# Altium PCB LoRaMicroClimate.PcbDoc
Units mil, origin at the board's own origin, x right, y up, seen from the top; angles counter-clockwise.
Board outline 3300 x 2600 mil, 4 copper layers (Top Layer, VBAT_POS, 3.3V_PER, Bottom Layer), stack 23.756 mil thick; 44 components, 29 nets, 146 pads, 30 vias.
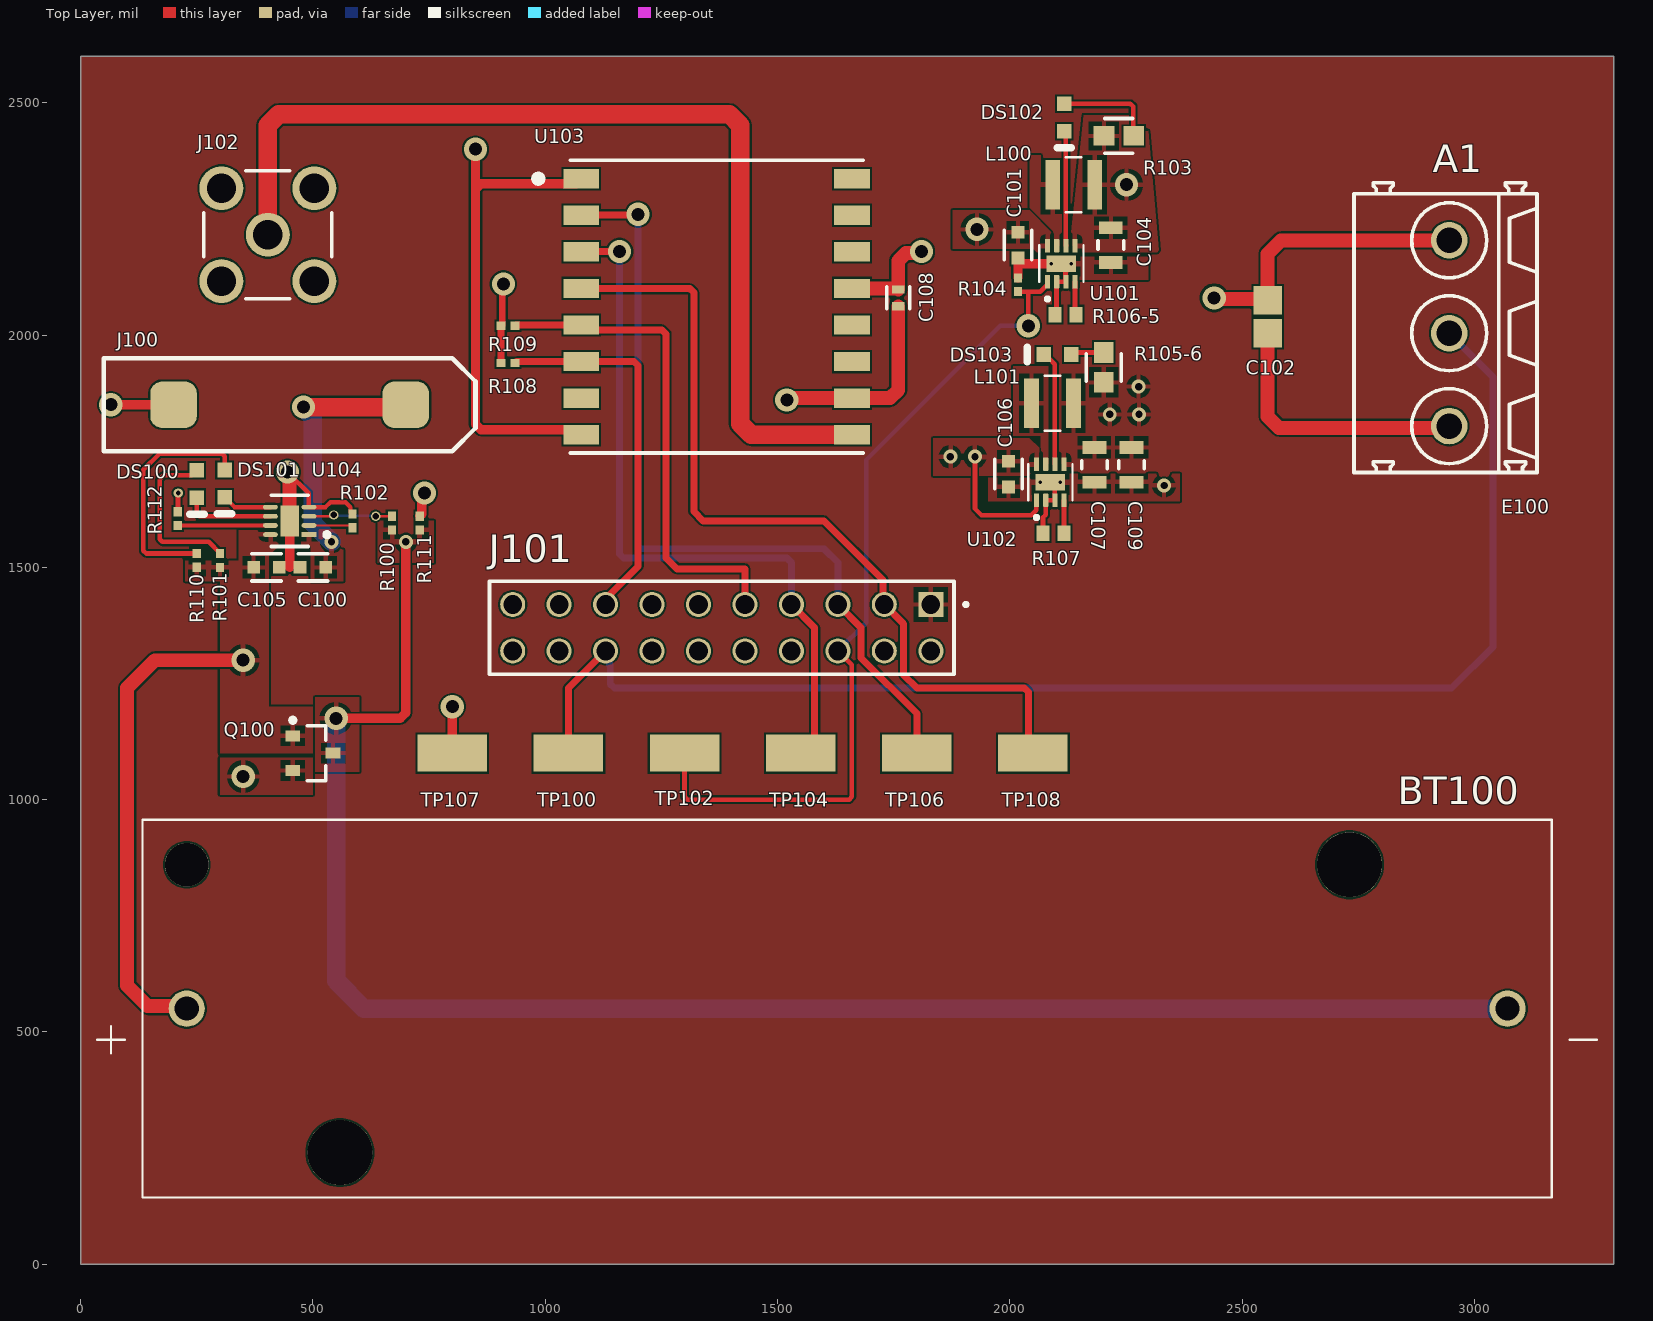
[diagram p0: Top Layer view]
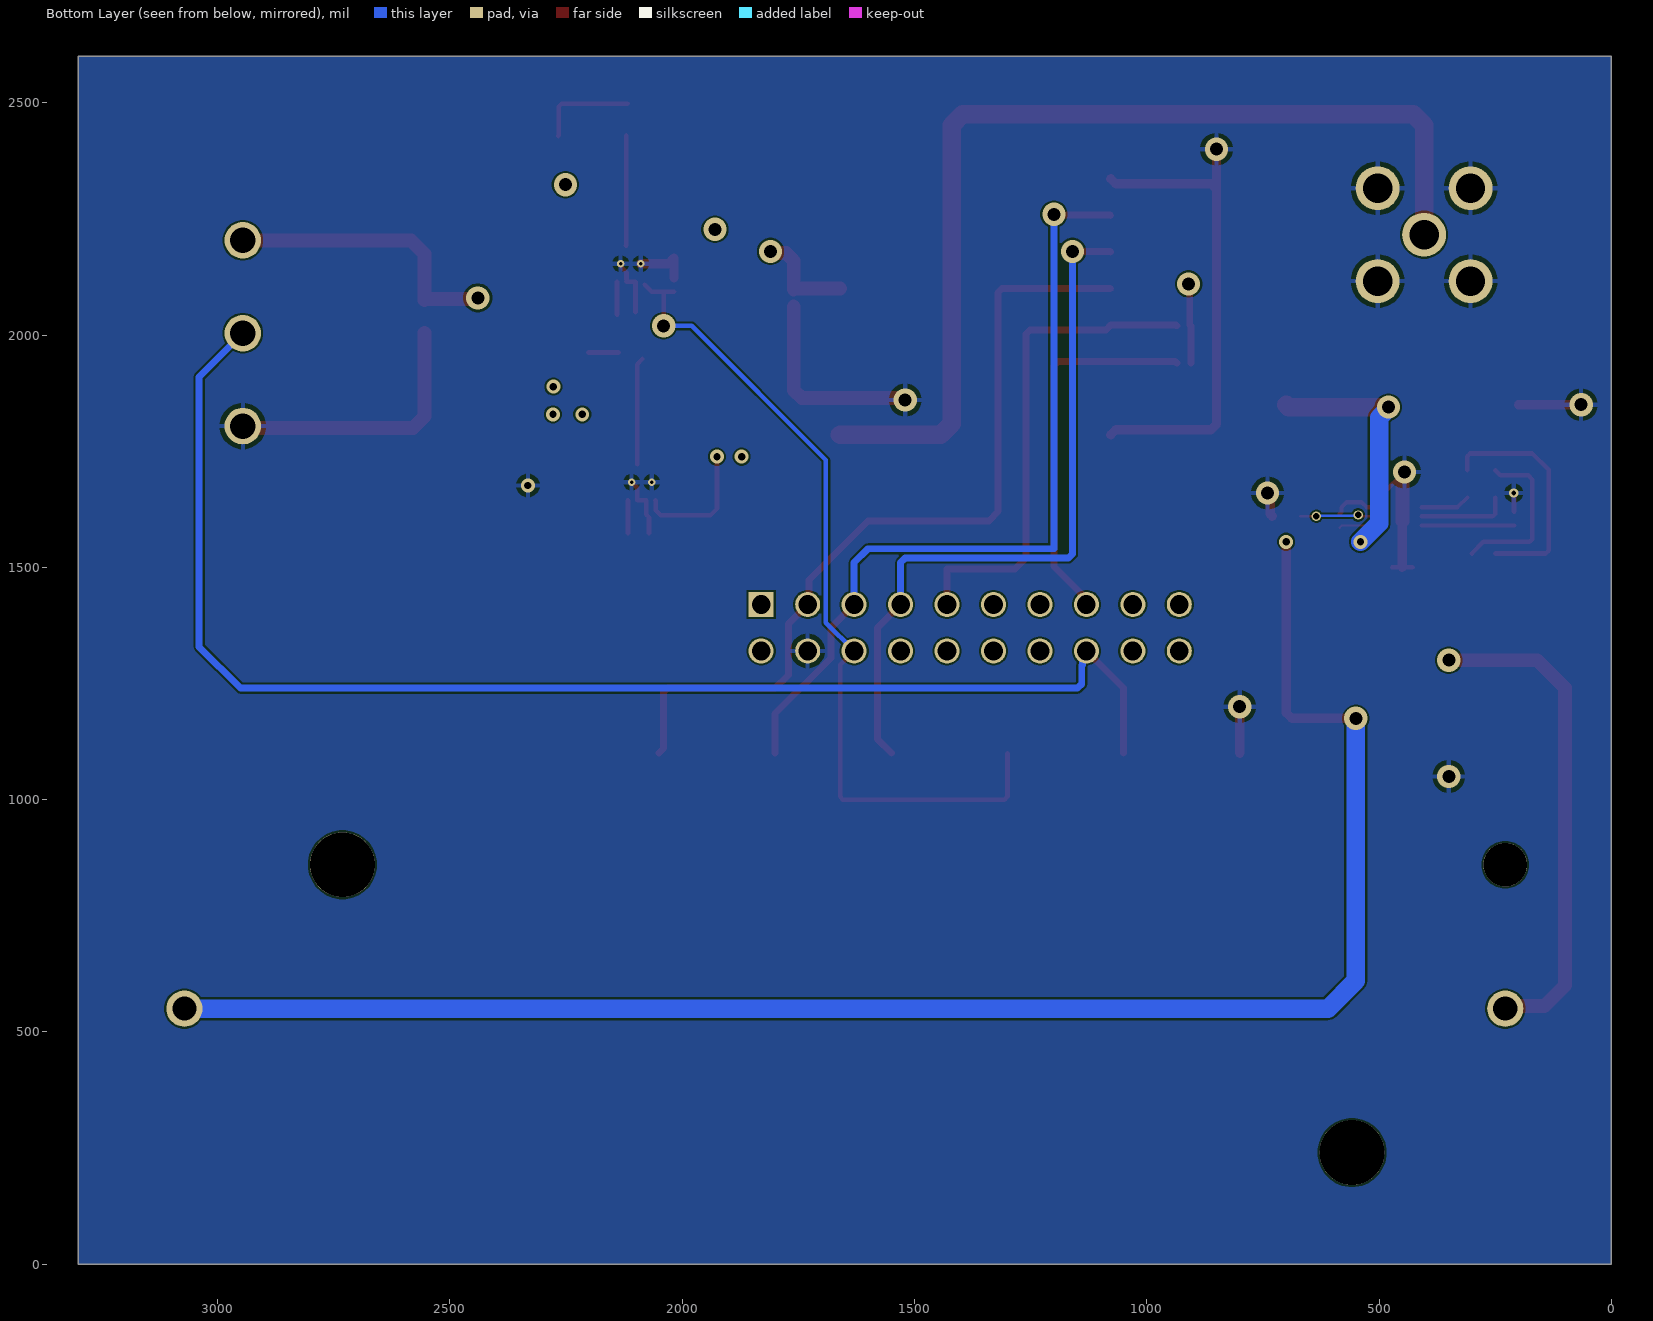
[diagram p1: Bottom Layer view, seen from below]
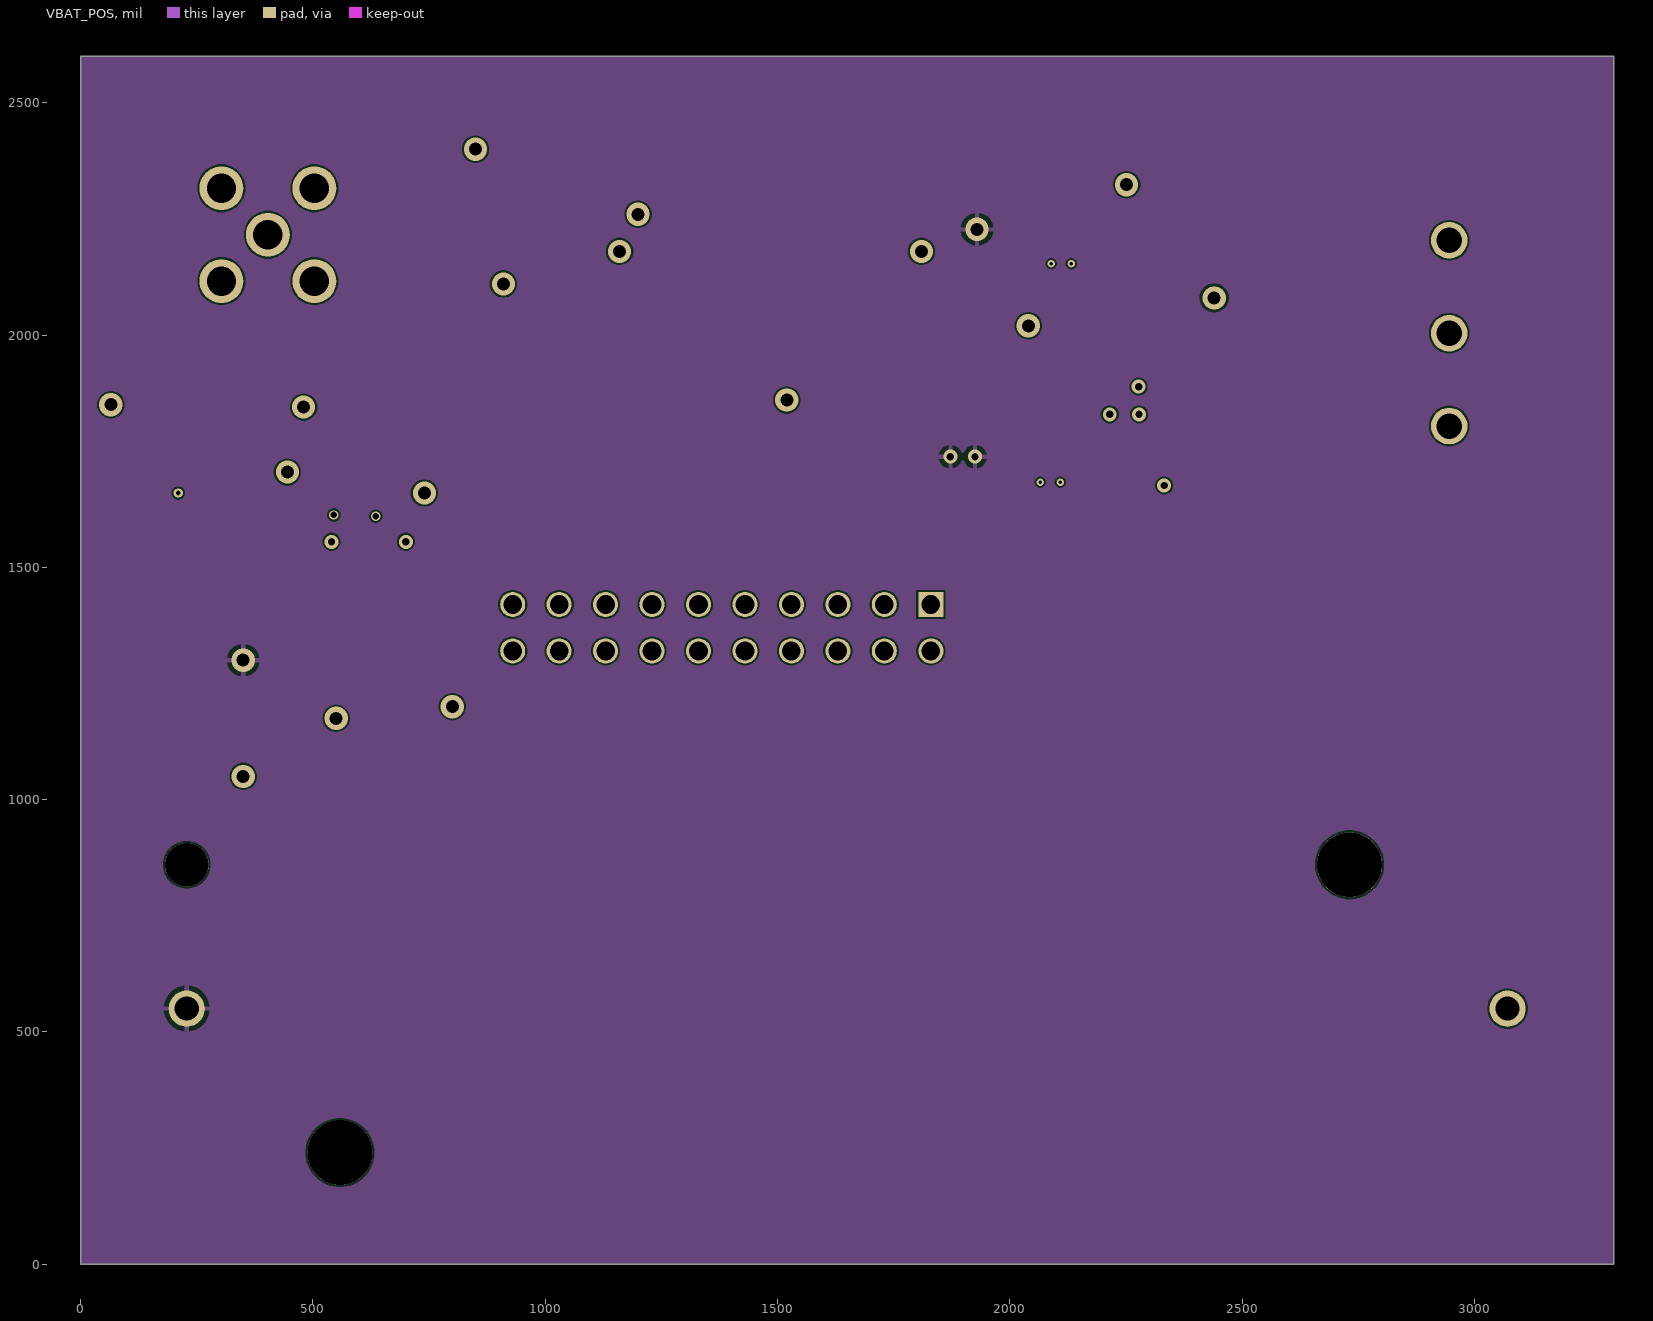
[diagram p2: VBAT_POS]
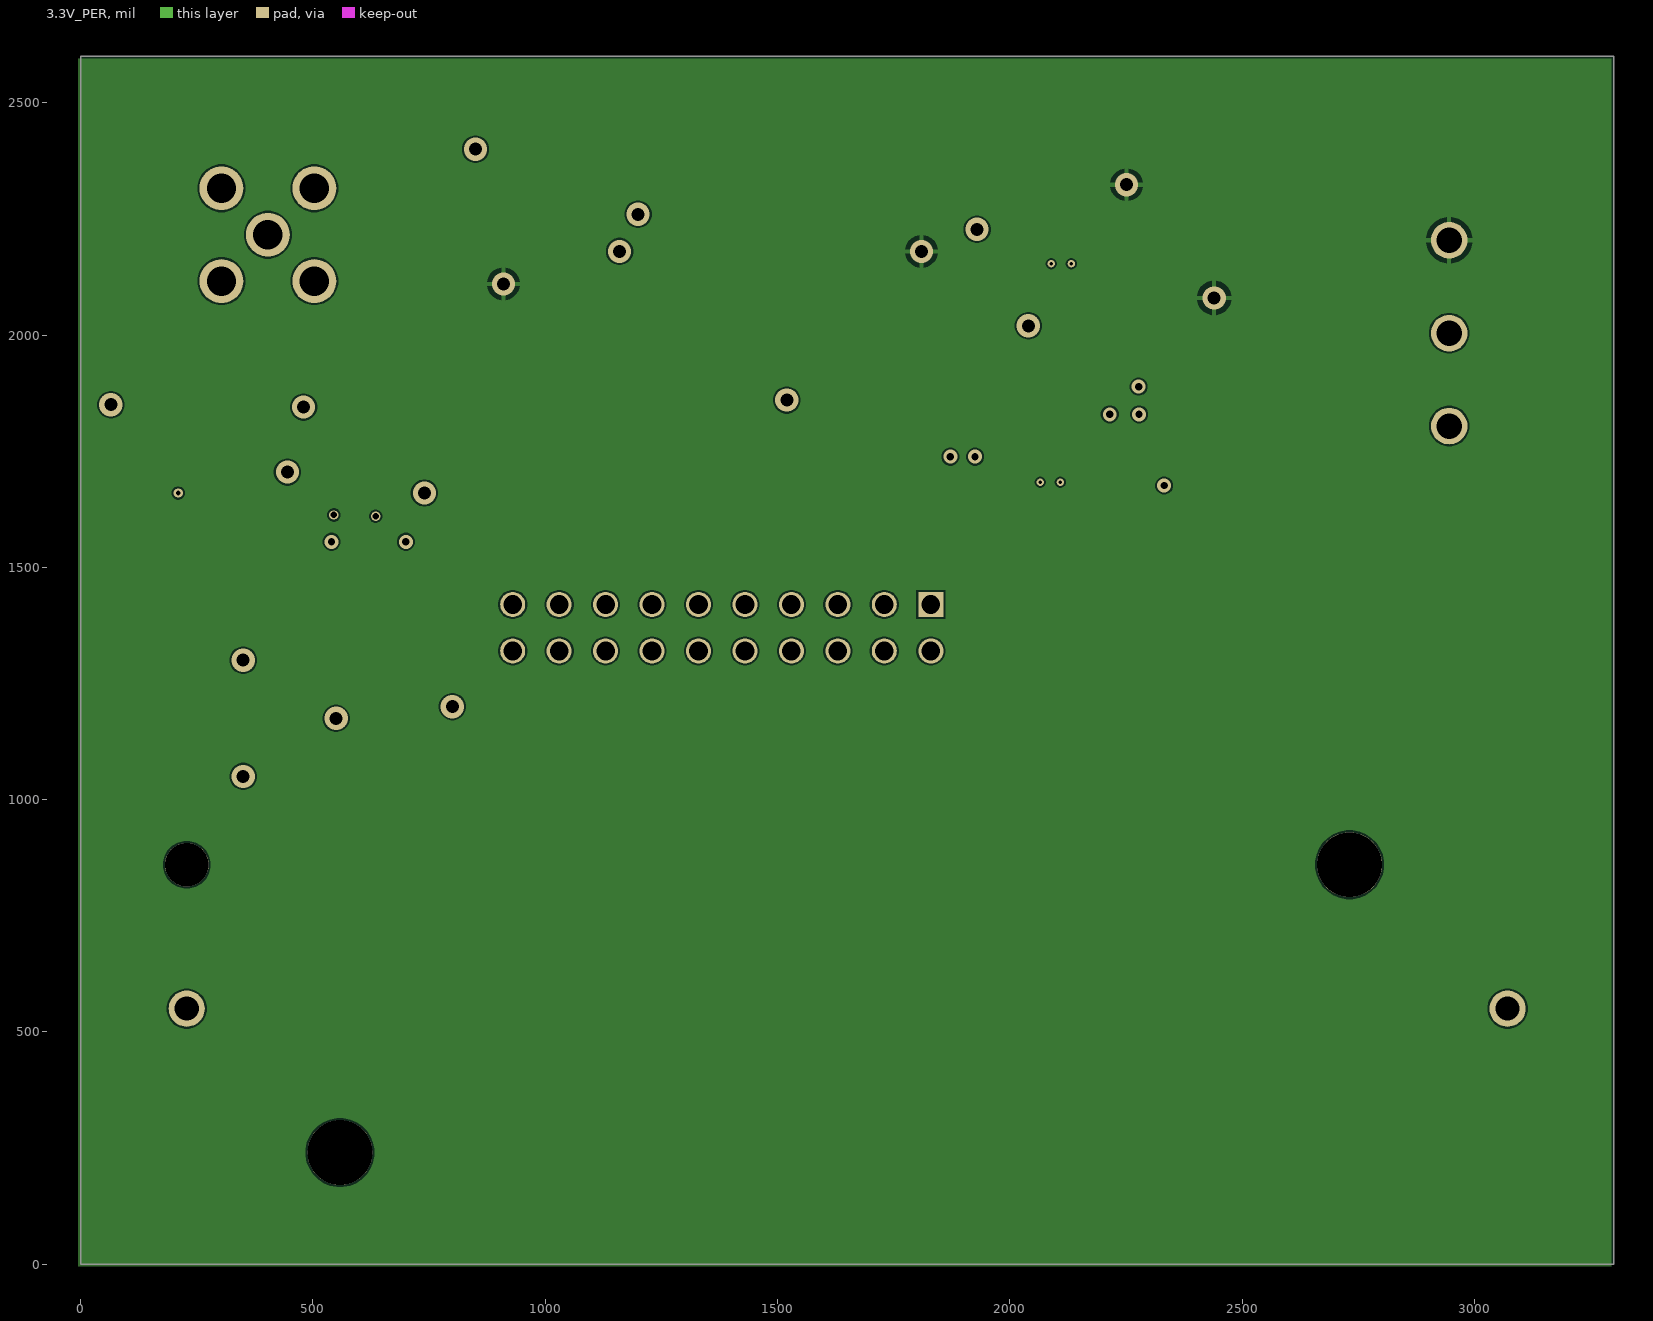
[diagram p3: 3.3V_PER]

## Layer stack, top to bottom
Top Solder: solder mask 0.4, Solder Resist, Dk 3.5
Top Layer: signal copper 1.4
Dielectric 2: prepreg 2.8, PP-006, Dk 4.1
VBAT_POS: signal copper 1.378
Dielectric 1: dielectric 12.6, FR-4, Dk 4.8
3.3V_PER: signal copper 1.378
Dielectric 3: prepreg 2.8, PP-006, Dk 4.1
Bottom Layer: signal copper 1.4
Bottom Solder: solder mask 0.4, Solder Resist, Dk 3.5

## Board outline
0,0 3300,0 3300,2600 0,2600

## Design rules (kind name [scope] priority, off if disabled: settings)
Clearance [All] p1: gap=4 ignorepadtopadclearanceinfootprint=FALSE except(0: Arc-Hole Track-Hole SMDPad-Hole THPad-Hole Via-Hole Fill-Hole Poly-Hole Region-Hole Text-Hole)
HoleSize [All] p1: absolutevalues=TRUE maxlimit=200 minlimit=1 maxpercent=80.000 minpercent=20.000
MinimumSolderMaskSliver MinimumSolderMaskSliver_1 [All] p1: minsoldermaskwidth=0.05
PolygonConnect [All] p1: connectstyle=Relief reliefconductorwidth=10 reliefentries=4 polygonreliefangle="90 Angle" airgapwidth=10
RoutingVias [All] p1: holewidth=28 width=50 viastyle="Through Hole" minholewidth=5 minwidth=10 maxholewidth=28 maxwidth=50
SilkToSolderMaskClearance [IsPad] p1: minsilkscreentomaskgap=4 clearancetoexposedcopper=TRUE
SolderMaskExpansion [All] p1: expansion=4 istentingtop=FALSE
Width [All] p1: maxlimit=250 minlimit=1 preferedwidth=10
27 further rules are at their usual default settings.

## Components (designator, comment, footprint, x,y, rotation, side; value= is the part's Value field where it differs from the comment)
BT100 "1043" BAT_1043 1650,550 r180 top
C100 "1uF" FP-C1608-080-0_1-MFG 500,1500 r180 top
C101 "10uF" FP-C1608-080-0_1-MFG 2017.59,2193.6 r270 top
C102 "2.2uF" CAPC2113X120X50ML20T30 2555,2039.43 r90 top
C104 "22uF" FP-GRM21B-0_15-MFG 2217.59,2193.6 r270 top
C105 "10uF" FP-C1608-080-0_1-MFG 400,1500 r0 top
C106 "10uF" FP-C1608-080-0_1-MFG 1997.25,1700.71 r270 top
C107 "22uF" FP-GRM21B-0_15-MFG 2182.25,1720.75 r270 top
C108 "10uF" FP-CL05A106MP5NUNC-MFG 1760,2080 r270 top
C109 "220uF" FP-GRM21B-0_15-MFG 2262.25,1720.75 r270 top
DS100 "HSMS-C190" AVAG-HSMX-C190_V 250,1679.53 r270 top
DS101 "HSMS-C190" AVAG-HSMX-C190_V 310,1680 r270 top
DS102 "HSMS-C190" AVAG-HSMX-C190_V 2117.35,2468.35 r270 top
DS103 "HSMS-C190" AVAG-HSMX-C190_V 2102.72,1958.15 r180 top
E100 "1716090000" LM_5_08_90_03 2938,2004 r90 top
J100 "Mini Solar Panel" P122 450,1850 r180 top
J101 "MSP430FR2355" SAMTEC_TSW-110-07-G-D-002 1380,1370 r180 top
J102 "SMA-J-P-X-ST-TH1" SAMTEC_SMA-J-P-X-ST-TH1 403,2216 r0 top
L100 "1uH" IND_ASPI-3012S-1R0M-T 2137.59,2323.6 r0 top
L101 "1uH" IND_ASPI-3012S-1R0M-T 2091.98,1853.15 r0 top
Q100 "2N7002-T1-E3" VISH-TO-236-3_A_L 500,1100 r0 top
R100 "?" RESC1005X40X25LL05T10 670,1595.24 r270 top
R101 "?" RESC1005X40X25LL05T10 300,1514.76 r270 top
R102 "?" RESC1005X40X25LL05T10 585,1600 r270 top
R103 "178KR" FP-CRCW0603-e3-IPC_A 2234.69,2428.6 r180 top
R104 "10kR" RESC1005X40X25LL05T10 2017.59,2108.36 r90 top
R105-6 "39.2KR" RESC1609X50X30LL10T20 2120,2044 r180 top (schematic designator R105)
R106-5 "178KR" FP-CRCW0603-e3-IPC_A 2202.25,1930.25 r270 top (schematic designator R106)
R107 "39.2KR" RESC1609X50X30LL10T20 2094.26,1573.32 r180 top
R108 "10kR" RESC1005X40X25LL05T10 920,1940 r180 top
R109 "10kR" RESC1005X40X25LL05T10 920,2020 r180 top
R110 "?" RESC1005X40X25LL05T10 250,1515 r270 top
R111 "?" RESC1005X40X25LL05T10 730,1595.24 r270 top
R112 "?" RESC1005X40X25LL05T10 208.86,1604.92 r270 top
TP100 "TMP_DATA" KSTN-5019_V 1050,1100 r180 top
TP102 "TRANSMIT_EN" KSTN-5019_V 1300,1100 r0 top
TP104 "MOSI" KSTN-5019_V 1550,1100 r0 top
TP106 "MISO" KSTN-5019_V 1800,1100 r180 top
TP107 "GND" KSTN-5019_V 800,1100 r0 top
TP108 "SCK" KSTN-5019_V 2050,1100 r0 top
U101 "TPS62082DSGR" SON50P200X200X80-9N 2110.94,2153.6 r90 top
U102 "TPS62082DSGR" SON50P200X200X80-9N 2087.25,1683.15 r90 top
U103 "RFM95W-868S2" XCVR_RFM95W-868S2 1369,2061 r0 top
U104 "BQ25170DSGR" FP-DSG0008A-IPC_A 450,1600 r180 top

## Footprints (in the part's own frame and the unit in brackets; to place one, negate y for a bottom-side part, rotate by r counter-clockwise, add the part's x,y. Pads: shape width x height; smd on the part's side, far side on the other; paste and mask are expansions set on the pad)
AVAG-HSMX-C190_V [mm] "SMD, 2-Leads, Body 1.6x0.8mm, Height 0.9mm"
  rect 0.8x0.8 smd: 1(-0.75,0) 2(0.75,0)
  silkscreen extent 1.65,-0.4 1.65,0.4, body extent -0.8,-0.4 0.8,0.4, height 0.9
BAT_1043 [mm]
  round 1.98 hole 1.32: N(-36.11,0) P(36.11,0)
  round 3.55 hole 3.55 unplated: ""(-27.47,-7.87) ""(27.73,7.87)
  round 2.39 hole 2.39 unplated: ""(36.11,-7.87)
  silkscreen extent -41,-10.33 41,10.33
CAPC2113X120X50ML20T30 [mm] "Chip Capacitor, 2-Leads, Body 2.05x1.25mm, IPC Low Density"
  rect 1.55x1.55 smd: 1(-0.9,0) 2(0.9,0)
  body extent -1.13,-0.72 1.12,0.72, height 1.2
FP-C1608-080-0_1-MFG [mm]
  rect 0.7x0.7 smd paste+0 mask+0: 1(-0.7,0) 2(0.7,0)
  silkscreen extent -0.8,-0.75 0.8,0.75, body extent -1.15,-0.55 1.15,0.55, height 0.25
FP-CL05A106MP5NUNC-MFG [mm]
  rect 0.45x0.675 smd paste+0 mask+0: 1(-0.463,0) 2(0.463,0)
  silkscreen extent -0.6,-0.63 0.6,0.63, body extent -0.79,-0.45 0.79,0.45, height 0.25
FP-CRCW0603-e3-IPC_A [mil]
  rect 44.69x41.82 smd paste+0 mask+0: 1(-32.1,0) 2(32.1,0)
  silkscreen extent -30,-37 30,37, body extent -74,-41 74,41, height 10
FP-DSG0008A-IPC_A [mm]
  rect 0.806x0.257 smd paste+0 mask+0: 1(-1.053,0.75)
  rrect100% 0.806x0.257 smd paste+0 mask+0: 2(-1.053,0.25) 3(-1.053,-0.25) 4(-1.053,-0.75) 5(1.053,-0.75) 6(1.053,-0.25) 7(1.053,0.25) 8(1.053,0.75)
  rect 1x1.7 smd paste-1000 mask+0: 9(0,0)
  silkscreen extent -2.16,-1.4 1,1.4, body extent -1.96,-1.5 1.96,1.5, height 0.25
FP-GRM21B-0_15-MFG [mm]
  rect 0.7x1.3 smd paste+0 mask+0: 1(-0.95,0) 2(0.95,0)
  silkscreen extent -0.23,-0.7 0.23,0.7, body extent -1.4,-0.8 1.4,0.8, height 0.25
IND_ASPI-3012S-1R0M-T [mm]
  rect 0.8x2.7 smd: 1(-1.15,0) 2(1.15,0)
  silkscreen extent -0.43,-1.5 0.43,1.5
KSTN-5019_V [mm] "Test Point, 1-Leads, Body 3.81x2.03mm"
  rect 3.8x2.03 smd: 1(0,0)
  body extent -1.9,-1.01 1.9,1.02, height 2.29
LM_5_08_90_03 [mm] "OMNIMATE Signal - Serie LM  LM 5.08/03/90 3.5"
  round 2 hole 1.4: A1(-5.08,-0.2) A2(0,-0.2) A3(5.08,-0.2)
  silkscreen extent -7.62,-5 8.22,5, body extent -7.62,-5 8.22,5, height 13.81
P122 [mil] "Monocrystalline Solar Cell 330 mW 7.09 V"
  rrect50% 100x100 smd: 1(-250,0) 2(250,0)
  silkscreen extent -400,-100 400,100
RESC1005X40X25LL05T10 [mm] "Chip Resistor, 2-Leads, Body 1.00x0.50mm, IPC High Density"
  rect 0.5x0.45 smd: 1(-0.375,0) 2(0.375,0)
  body extent -0.53,-0.27 0.53,0.28, height 0.4
RESC1609X50X30LL10T20 [mm] "Chip Resistor, 2-Leads, Body 1.55x0.85mm, IPC High Density"
  rect 0.7x0.85 smd: 1(-0.575,0) 2(0.575,0)
  body extent -0.82,-0.48 0.82,0.48, height 0.5
SAMTEC_SMA-J-P-X-ST-TH1 [mm]
  round 2.4 hole 1.6: 1(0,0) 2(2.54,-2.54) 3(2.54,2.54) 4(-2.54,2.54) 5(-2.54,-2.54)
  silkscreen extent -3.5,-3.5 3.5,3.5
SAMTEC_TSW-110-07-G-D-002 [mm]
  rect 1.37x1.37 hole 1.02: 01(-11.43,-1.27)
  round 1.37 hole 1.02: 03(-8.89,-1.27) 04(-8.89,1.27) 05(-6.35,-1.27) 06(-6.35,1.27) 07(-3.81,-1.27) 08(-3.81,1.27) 09(-1.27,-1.27) 10(-1.27,1.27) 11(1.27,-1.27) 12(1.27,1.27) 13(3.81,-1.27) 14(3.81,1.27) 15(6.35,-1.27) 16(6.35,1.27) 17(8.89,-1.27) 18(8.89,1.27) 19(11.43,-1.27) 20(11.43,1.27)
  silkscreen extent -13.45,-2.54 12.7,2.54
SON50P200X200X80-9N [mm]
  rrect25% 0.74x0.28 smd: 1(-0.985,0.75) 2(-0.985,0.25) 3(-0.985,-0.25) 4(-0.985,-0.75) 5(0.985,-0.75) 6(0.985,-0.25) 7(0.985,0.25) 8(0.985,0.75)
  rect 0.9x1.6 smd paste-2: 9(0,0)
  round 0.4 hole 0.2 mask+0: 9_1(0,0.55) 9_2(0,-0.55)
  silkscreen extent -2.02,-1.21 1,1.21, body extent -1,-1 1,1, height 0.8
VISH-TO-236-3_A_L [mm] "SOT-23, 3-Leads, Body 3.04x1.4mm, Pitch 0.95mm, IPC High Density"
  rect 0.8x0.6 smd: 1(-1.1,0.95) 2(-1.1,-0.95) 3(1.1,0)
  silkscreen extent -1.22,-1.5 0.7,1.92, body extent -1.32,-1.52 1.32,1.52, height 1.12
XCVR_RFM95W-868S2 [mm]
  rect 1.95x1.05 smd: 1(-7.4,7) 2(-7.4,5) 3(-7.4,3) 4(-7.4,1) 5(-7.4,-1) 6(-7.4,-3) 7(-7.4,-5) 8(-7.4,-7) 9(7.4,-7) 10(7.4,-5) 11(7.4,-3) 12(7.4,-1) 13(7.4,1) 14(7.4,3) 15(7.4,5) 16(7.4,7)
  silkscreen extent -10.04,-8 8,8

## Part data
BT100: "Battery Holder (Open) 18650 1 Cell PC Pin", Package=None, Availability=Unavailable, MP=1043, Price=None
C100: library part CMP-2000-04979-3, "Multilayer Ceramic Capacitors 10μF ±10% 10V X5R SMD 0603", Capacitance=10uF, Case Code (Imperial)=0603, Case Code (Metric)=1608, Dielectric=X5R, Dielectric Material=Ceramic, Max Operating Temperature=85°C, Min Operating Temperature=-55°C, Package Quantity=1, Tolerance=10%, Voltage=10V, Case/Package=0603, Construction=Flat, Depth=0.8mm, Height=0.8mm, Lead Free="Lead Free", Length=1.6mm, Mount="Surface Mount", Number of Pins=2, Packaging="Tape and Reel", Radiation Hardening=No, REACH SVHC="No SVHC", Resistor Type=Ceramic, RoHS Compliant=Yes, Series=C, Termination=SMD/SMT, Thickness=0.035inch, Voltage Rating=10V, Voltage Rating (DC)=10V, Weight=7.1E-05oz, Width=0.8mm
C101 C105 C106: library part CMP-2000-04979-3, "Multilayer Ceramic Capacitors 10μF ±10% 10V X5R SMD 0603", Case Code (Imperial)=0603, Case Code (Metric)=1608, Dielectric=X5R, Dielectric Material=Ceramic, Max Operating Temperature=85°C, Min Operating Temperature=-55°C, Package Quantity=1, Tolerance=10%, Voltage=10V, Capacitance=10uF, Case/Package=0603, Construction=Flat, Depth=0.8mm, Height=0.8mm, Lead Free="Lead Free", Length=1.6mm, Mount="Surface Mount", Number of Pins=2, Packaging="Tape and Reel", Radiation Hardening=No, REACH SVHC="No SVHC", Resistor Type=Ceramic, RoHS Compliant=Yes, Series=C, Termination=SMD/SMT, Thickness=0.035inch, Voltage Rating=10V, Voltage Rating (DC)=10V, Weight=7.1E-05oz, Width=0.8mm
C102: library part CMP-2007-04039-1, Manufacturer="AVX Interconnect / Elco", Part Number=TAJR225M010RNJ
C104 C107: library part CMP-2007-03385-2, "Chip Multilayer Ceramic Capacitors for General Purpose, 0805, 22uF, X5R, 15%, 20%, 6.3V", Case Code (Imperial)=0805, Case Code (Metric)=2012, Dielectric=X5R, Max Operating Temperature=85°C, Min Operating Temperature=-55°C, Package Quantity=1, Tolerance=20%, Voltage=6.3V, Capacitance=22uF, Case/Package=0805, Depth=1.25mm, Height=1.25mm, Lead Free="Lead Free", Length=2mm, Material=Ceramic, Mount="Surface Mount", Packaging="Tape and Reel", Radiation Hardening=No, REACH SVHC="No SVHC", Termination=SMD/SMT, Thickness=0.053inch, Voltage Rating=6.3V, Voltage Rating (DC)=6.3V, Width=0.049inch
C108: library part CMP-13271-000002-1, "CAP CER 10UF 10V X5R 0402", Manufacturer=Samsung, Manufacturer Part Number=CL05A106MP5NUNC, Temperature="-55°C to +85°C", Temperature Characteristic=X5R, Temperature Coefficient=15%, Temperature Range High=+85°C, Temperature Range Low=-55°C, Tolerance=20%, Voltage Rating=10V, Automotive=No, Capacitance=10uF, Category=Cap, ComponentLink2Description=Datasheet, ComponentLink2URL=http://www.samsungsem.com/kr/support/product-search/mlcc/__icsFiles/afieldfile/2019/05/10/19-CL05A106MP5NUNC.pdf, Device Class L1="Passive Components", Device Class L2=Capacitors, Device Class L3="Ceramic Capacitors", Digikey Description="CAP CER 10UF 10V X5R 0402", Height=0.7mm, Ipc Land Pattern Name=CAPC10050X50, Lead Free=Yes, Material=Ceramic, Octopart=https://octopart.com/cl05a106mp5nunc-samsung-22457395, Package=CL05A106MP5NUNC, RoHS=TRUE
C109: library part CMP-2007-03385-2, "Chip Multilayer Ceramic Capacitors for General Purpose, 0805, 22uF, X5R, 15%, 20%, 6.3V", Capacitance=22uF, Case Code (Imperial)=0805, Case Code (Metric)=2012, Dielectric=X5R, Max Operating Temperature=85°C, Min Operating Temperature=-55°C, Package Quantity=1, Tolerance=20%, Voltage=6.3V, Case/Package=0805, Depth=1.25mm, Height=1.25mm, Lead Free="Lead Free", Length=2mm, Material=Ceramic, Mount="Surface Mount", Packaging="Tape and Reel", Radiation Hardening=No, REACH SVHC="No SVHC", Termination=SMD/SMT, Thickness=0.053inch, Voltage Rating=6.3V, Voltage Rating (DC)=6.3V, Width=0.049inch
DS100 DS101 DS102 DS103: library part CMP-2000-06427-1, "LED Uni-Color Red, 52 mW, 20 mA, -40 to 85 degC, 2-Pin SMD, RoHS, Tape and Reel", Emitting Color=Red, Forward Current=25mA, Forward Voltage=2.6V, Manufacturer=Avago, Operating Temp Range=-40Cto85C, Operating Temperature Classification=Industrial, Package Description="2-Pin Surface Mount Device, Body 1.6 x 0.8 mm, Height 0.9 mm", Package Reference=HSMX-C190, Package Type=ChipLed, Power Dissipation=52W, Reverse Voltage=5V, Test Current (It)=20mA, Chip Material=GaP, Datasheet URL=http://docs.avagotech.com/docs/AV02-0551EN, Datasheet Version=03/2012, DELETED=Compliant, Dominant Wave Length=626nm, High Brightness=No, Lens Dimensions=1x0.8x0.5mm, Lens Type=ColorlessDiffused, Lum Intensity=10mcd, Luminous Intensity=10mcd, Main Category=ChipLED, Manufacturer URL=http://www.avagotech.com/, Mounting=SurfaceMount, Mounting Technology=SurfaceMount, Number of  Elements=1, Packaging=TapeandReel, Peak Wavelength=630nm, Pin Count=2, Product Depth (mm)=0.8mm, Product Height (mm)=0.8mm, Product Length (mm)=1.6mm, Rad Hardened=No, Shape Type=Rectangular, Type=Uni-Color, Viewing Angle=170deg
E100: library part CMP-1559-01768-1, "OMNIMATE Signal - series LM", Colour=Orange, Manufacturer=Weidmueller, Rated_current_use_group_B_UL_1059="15 A", Rated_voltage_for_surge_voltage_class_pollution_degree_II_2="630 V", Rated_voltage_use_group_B_UL_1059="300 V", UL_94_flammability_rating=V-0, ComponentLink1Description="Manufacturer URL", ComponentLink1URL=http://www.weidmueller.com/, ComponentLink2Description="URL Link1", ComponentLink2URL=http://catalog.weidmueller.com/catalog/Start.do?localeId=en&ObjectID=1716090000, Contact_material=Cu-Leg, Contact_surface=tinned, Insulating_material="Wemid (PA)", Mounting_onto_the_PCB="Solder connection", No_of_poles=3, PackageReference=LM_5_08_90_03, Packaging=Box, PartNumber=1716090000, Pitch_inch="0,2 inch", Pitch_mm="5,08 mm", Qty="500 PCS", Revision=V1, Short_text_for_material="LM 5.08/03/90 3.5SN OR BX", Side_termination_characteristic="closed side", Solder_pin_length_mm="3,5 mm", Solid_max_H05_07_V_U="2,5 mm²", Solid_min_H05_07_V_U="0,2 mm²", Wire_cross_section_AWG_max_UL_1059="AWG 14", Wire_cross_section_AWG_min_UL_1059="AWG 24"
J100: library part P122, "The 0.3 Watt 6 Volt mini solar panel is designed for 5-7 year outdoor applications. It will charge a 1S LiIon or LiFePO4 cell. The panel"
J101: library part TSW-110-07-G-D-002, Package=None, Availability=Unavailable, MP=TSW-110-07-G-D-002, Price=None
J102: "SMA STRAIGHT, THROUGH HOLE JACK- 50 OHM", Package=None, Availability=Unavailable, MP=SMA-J-P-X-ST-TH1, Price=None
L100 L101: library part ASPI-3012S-1R0M-T, "Inductor Power Shielded Wirewound 1uH 20% 100KHz 2.2A 0.04Ohm DCR 1212 T/R", Package=None, Availability="In Stock", Check_prices=https://www.snapeda.com/parts/ASPI-3012S-1R0M-T/Abracon/view-part/?ref=eda, MF="Abracon Corporation", MP=ASPI-3012S-1R0M-T, Price=None, Purchase-URL=https://pricing.snapeda.com/search/part/ASPI-3012S-1R0M-T/?ref=eda, SnapEDA_Link=https://www.snapeda.com/parts/ASPI-3012S-1R0M-T/Abracon/view-part/?ref=snap
Q100: library part CMP-2000-05565-1, "N-Channel MOSFET, 115 mA, 60 V, -55 to 150 degC, 3-Pin SOT23, RoHS, Tape and Reel", Continuous Drain Current Id=115mA, Drain Source Voltage Vds=60V, Manufacturer=Vishay, On Resistance Rds(on)=7.5ohm, Operating Temperature Max=150°C, Package Description="3-Pin Small Outline Transistor, Body 2.92 x 1.3 mm, Pitch 0.95 mm", Package Reference=TO-236-3, Power Dissipation Pd=200mW, Rds(on) Test Voltage Vgs=10V, Threshold Voltage Vgs=2.1V, Transistor Case Style=TO-236, Datasheet URL=http://www.vishay.com/docs/70226/70226.pdf, Datasheet Version="Rev. F, 07/2001", Manufacturer URL=http://www.vishay.com/, Mounting Technology=SurfaceMount, MSL=MSL1-Unlimited, No. of Pins=3, Package URL=http://www.vishay.com/docs/71196/71196.pdf, SVHC=NoSVHC(17-Dec-2014), Transistor Polarity=NChannel
R100 R101 R102 R104 R108 R109 R110 R111 R112: library part CMP-2002-07353-1, Manufacturer="Yageo / Phycomp", Part Number=RC0402FR-0710KL
R103 R106-5: library part CMP-2000-02945-2, "RES Thick Film, 178kΩ, 1%, 0.1W, 100ppm/°C, 0603", Case Code (Imperial)=0603, Case Code (Metric)=1608, Max Operating Temperature=155°C, Max Power Dissipation=100mW, Min Operating Temperature=-55°C, Package Quantity=10, Resistance=178kR, Temperature Coefficient=100ppm/°C, Tolerance=1%, Voltage Rating=75V, Case/Package=0603, Composition="Thick Film", Contact Plating=Tin, Depth=0.85mm, Features="Automotive AEC-Q200", Height=0.45mm, Lead Free="Lead Free", Length=1.55mm, Military Standard=Not, Number of Pins=2, Number of Terminations=2, Packaging="Tape and Reel", Power Rating=100mW, Radiation Hardening=No, Termination=SMD/SMT, Voltage Rating (DC)=75V, Weight=7.1E-05oz, Width=0.033inch
R105-6 R107: library part CMP-2000-03290-1, Manufacturer="Vishay Dale", Part Number=CRCW060339K2FKEA
TP100 TP102 TP104 TP106 TP107 TP108: library part CMP-1672-00008-1, "Test Point, 1 Position SMD, RoHS, Tape and Reel", Package Quantity=1000, ComponentLink1Description="Manufacturer URL", ComponentLink1URL=http://www.keyelco.com/, ComponentLink2Description=Datasheet, ComponentLink2URL=http://www.keyelco.com/product-pdf.cfm?p=1357, Contact Plating=Silver, DatasheetVersion=03/2014, Mount="Surface Mount", Mounting Technology="Surface Mount", PackageDescription="1-Pin Surface Mount Device, Body 3.81 x 2.03 mm", PackageReference=5019, Packaging="Tape and Reel", Pins=1, RoHSCompliant=True
U101 U102: "1.2A High Efficient Step Down Converter in 2x2mm SON Package. 3.3 Vout (Min) 8-WSON -40 to 125", Package="WSON-8 Texas Instruments", Check_prices=https://www.snapeda.com/parts/TPS62082DSGR/Texas%20Instruments/view-part/232318/?ref=eda, Digi-Key_Part_Number=296-49331-1-ND, MF="Texas Instruments", MP=TPS62082DSGR, Purchase-URL=https://pricing.snapeda.com/search/part/TPS62082DSGR/?ref=eda, SnapEDA_Link=https://www.snapeda.com/parts/TPS62082DSGR/Texas%20Instruments/view-part/232318/?ref=snap
U103: "Mod Txrx Lora +20dbm 868mhz Smd", Package=None, Availability=Unavailable, MP=RFM95W-868S2, Price=None
U104: library part CMP-04911-000084-1, "800-MA LINEAR BATTERY CHARGER FO"

## Via types
v1: diameter 50, hole 28, Top Layer to Bottom Layer, 18 vias
v2: diameter 30, hole 16, Top Layer to Bottom Layer, 8 vias
v3: diameter 20, hole 14, Top Layer to Bottom Layer, 2 vias
v4: diameter 53.94, hole 40.16, Top Layer to Bottom Layer, 1 vias
v5: diameter 20, hole 10, Top Layer to Bottom Layer, 1 vias

## Nets (pads, with @x,y where several pads share a name; then routed paths per layer and width w, separated by ;. In a path a pad name is that pad's centre, name@x,y a point inside that pad or via, vN(x,y) a via of type N, cw(c..) or ccw(c..) an arc to the next point about the centre after c; other vN are vias at no path point)
ANT: J102.1 U103.9 | length 2164.8
  Top Layer w40: J102.1 403,2451.57 426.43,2475 1396.57,2475 1420,2451.57 1420,1808.84 1443.43,1785.41 U103.9
C\S\_LORA: J101.09 R109.1 U103.5 | length 1072.6
  Top Layer w15: R109.1 935.75,2020 937.38,2021.63 U103.5 1088.17,2011.12 1251.21,2011.12 1260,2002.34 1260,1520 1283.31,1496.69 1430,1496.69 J101.09
FB_LORA: R105-6.1 U101.4 | length 71.3
  Top Layer w10: R105-6.1@2140.23,2043.6 2140.23,2043.83 2140.46,2044.07 U101.4
GND: C100.2 C101.2 C102.1 C104.2 C105.2 C106.2 C107.2 C108.2 C109.2 E100.A1 J100.2 J101.04 J102.2 J102.3 J102.4 J102.5 Q100.2 R102.1 R104.2 R105-6.2 R107.2 R111.1 R112.1 TP107.1 U101.2 U101.3 U101.9 U101.9_1 U101.9_2 U102.2 U102.3 U102.9 U102.9_1 U102.9_2 U103.1 U103.8 U103.10 U104.4 U104.9 | length 3247.9
  Top Layer w9: C105.2 450,1500 C100.2 ; U104.4@490.82,1630.04 491.34,1629.53 U104.4 527.22,1629.53 537.69,1640 570,1640 580.64,1629.36 580.64,1619.12 R102.1@583.46,1616.3
  Top Layer w10: R112.1 209.43,1620.26 209.43,1659.43 v5(210,1660) ; v1(445,1705) 490.82,1659.18 U104.4@490.82,1630.04 ; R102.1@583.46,1616.3 R102.1 ; R107.2 2071.63,1607.29 2077.41,1613.07 U102.2 U102.3 2097.09,1671.34 U102.9_2 ; R105-6.2@2100.58,2049.23 2100.58,2114.31 U101.2 U101.3 ; U101.3@2119.95,2120.72 2119.95,2134.79 2131.49,2146.33 2131.49,2152.5 U101.9_2
  Top Layer w20: v1(65,1850) J100.2 ; 450,1500 U104.9 ; R111.1 734.26,1614.26 734.26,1654.26 v1(740,1660) ; TP107.1 v1(800,1200) ; v1(850,2400) 850,2314.21 ; U103.8 1066.99,1796.08 861.72,1796.08 850,1807.79 850,2314.21 ; U103.1 1066.99,2325.92 861.72,2325.92 850,2314.21 ; R104.2@2017.59,2123.44 C101.2 2030.03,2153.6 U101.9_1
  Top Layer w30: v1(445,1705) 445,1699.59 450,1694.59 U104.9 ; v1(1520,1860) 1524.15,1864.15 U103.10 1742.43,1864.15 1760,1881.72 C108.2 ; C102.1 2555,1825 2580,1800 2941.87,1800 E100.A1
  other v1: 350,1050
  other v2: 2332.25,1676.15
LORA_EN: J101.06 R104.1 TP102.1 U101.1 | length 1834
  Top Layer w10: TP102.1 1300,1005.86 1305.86,1000 1654.14,1000 1660,1005.86 1660,1290 J101.06 ; R104.1 2041.59,2093.6 ; v1(2040,2020) 2040,2092.01 2041.59,2093.6 ; U101.1@2080.58,2108.6 2065.58,2093.6 2041.59,2093.6
  Bottom Layer w10: J101.06 1691,1381 1691,1731 1980,2020 v1(2040,2020)
MCU_3.3V: C107.1 C109.1 J101.01 L101.2 R106-5.2 U102.5
  other v2: 2215.25,1829.15 2278.25,1829.15 2277.25,1889.15
MISO: J101.05 TP106.1 U103.2 | length 1766.1
  Top Layer w15: U103.2 1078.74,2258.93 1198.93,2258.93 v1(1200,2260) ; J101.05 1680,1370 1680,1305.14 1800,1185.14 TP106.1
  Bottom Layer w15: v1(1200,2260) 1200,1540 1600,1540 1630,1510 J101.05
MOSI: J101.07 TP104.1 U103.3 | length 1534.8
  Top Layer w15: U103.3 1078.11,2179.56 1159.56,2179.56 v1(1160,2180) ; J101.07 1580,1370 1580,1130 TP104.1
  Bottom Layer w15: v1(1160,2180) 1160,1528.79 1168.79,1520 1520,1520 1530,1510 J101.07@1530,1440
NetDS100_1: DS100.1 R101.1 | length 360.1
  Top Layer w10: DS100.1 239.25,1698.31 179.16,1698.31 170,1689.14 170,1560.86 175.86,1555 275.51,1555 300,1530.51 R101.1
NetDS100_2: DS100.2 U104.6 | length 195.6
  Top Layer w9: DS100.2 250,1615.11 255.27,1609.84 U104.6
NetDS101_1: DS101.1 R110.1 | length 513.3
  Top Layer w10: R110.1 140.86,1529.76 135,1535.62 135,1710 170,1745 304.15,1745 310,1739.14 DS101.1
NetDS101_2: DS101.2 U104.5 | length 107.2
  Top Layer w9: DS101.2 330.94,1629.53 U104.5
NetDS102_1: DS102.1 R103.1 | length 214.6
  Top Layer w10: DS102.1 2259.73,2497.87 2265.59,2492.01 2265.59,2429.8 R103.1
NetDS102_2: DS102.2 U101.6 | length 237.9
  Top Layer w10: DS102.2@2120.78,2429.53 U101.6 U101.6@2121.29,2192.89
NetDS103_1: DS103.1 R106-5.1 | length 65.8
  Top Layer w10: DS103.1@2136.46,1962.35 R106-5.1
NetDS103_2: DS103.2 U102.6 | length 231.1
  Top Layer w10: DS103.2@2086.03,1948.44 2097.09,1937.38 U102.6
NetL100_1: L100.1 U101.7
NetL101_1: L101.1 U102.7
NetR100_1: R100.1 U104.3 | length 180.8
  Top Layer w5: U104.3 491.54,1609.92 542.26,1609.92 v3(545,1612.66) ; v3(635,1610) R100.1
  Bottom Layer w5: v3(545,1612.66) 546.33,1611.33 633.67,1611.33 v3(635,1610)
NetR102_2: R102.2 U104.2 | length 95.6
  Top Layer w5: U104.2 502.27,1590.16 580.08,1590.16 R102.2
NetR107_1: R107.1 U102.4 | length 71.1
  Top Layer w10: U102.4 2116.84,1644.31 2116.84,1573.38 R107.1
NetR112_2: R112.2 U104.7 | length 199.7
  Top Layer w9: R112.2 U104.7
RESET_LORA: J101.15 R108.1 U103.6 | length 813.2
  Top Layer w15: R108.1 935.75,1940 938.64,1942.89 U103.6 1191.21,1942.89 1200,1934.1 1200,1502.18 1130,1432.18 J101.15
SCK: J101.03 TP108.1 U103.4 | length 1827.5
  Top Layer w15: U103.4 1078.03,2100 1311.21,2100 1320,2091.21 1320,1620 1340,1600 1600,1600 1727.5,1472.5 1727.5,1422.5 J101.03 1771.5,1378.5 1771.5,1268.5 1800,1240 2031.21,1240 2040,1231.21 2040,1110 TP108.1
TMP_DATA: E100.A2 J101.16 TP100.1 | length 2983.1
  Top Layer w15: TP100.1 1050,1240 J101.16
  Bottom Layer w15: J101.16 1138.61,1311.39 1138.61,1290.1 1140,1288.71 1140,1248.79 1148.79,1240 2951.21,1240 3040,1328.79 3040,1909.87 E100.A2
VBAT_NEG: BT100.N Q100.3 R100.2 R111.2 | length 3634.6
  Top Layer w20: v1(550,1175) 688.28,1175 700,1186.72 v2(700,1555)
  Bottom Layer w40: v1(550,1175) 550,610 610,550 BT100.N
VBAT_POS: BT100.P C101.1 C105.1 C106.1 Q100.1 R101.2 R110.2 U101.8 U102.1 U102.8 U104.8 | length 1339.8
  Top Layer w10: v2(1925.25,1738.15) 1925.25,1626.01 1939.11,1612.15 2046.25,1612.15 2057.21,1623.11 2057.21,1643.86 U102.1
  Top Layer w30: BT100.P 222.72,555.63 144.37,555.63 100,600 100,1240 160,1300 v1(350,1300)
  other v1: 1929.59,2227.6
  other v2: 1872.25,1738.15
VOS_LORA: C102.2 C104.1 C108.1 E100.A3 L100.2 R103.2 R108.2 R109.2 U101.5 U103.13 | length 1009.7
  Top Layer w15: R108.2 R109.2 906.22,2020 907.58,2021.36 907.58,2107.58 v1(910,2110)
  Top Layer w30: U103.13 1757.84,2100.37 C108.1 1760,2160 1776.17,2176.17 1806.17,2176.17 v1(1810,2180) ; v1@2442.57,2077.43 2552.43,2077.43 C102.2 2555,2175 2584,2204 E100.A3
  other v1: 2440,2080 2251.59,2323.6
VSOLAR: C100.1 J100.1 U104.1 | length 536.9
  Top Layer w40: v1(480,1845) 695,1845 J100.1
  Bottom Layer w40: v1(480,1845) 480,1842.29 500,1822.29 500,1595 v2(540,1555)
pads on no net: BT100. J101.08 J101.10 J101.11 J101.12 J101.13 J101.14 J101.17 J101.18 J101.19 J101.20 U103.7 U103.11 U103.12 U103.14 U103.15 U103.16
copper on no net:
  other v4: 1830,1320

## Polygon pours and split planes (outlines as drawn)
MCU_3.3V on Top Layer "GND" (solid, remove dead copper, pour order 20): 0,2600 3300,2600 3300,0 0,0
GND on Top Layer "GND" (solid, remove dead copper, pour order 7): 1977.59,2168.6 1977.59,2108.6 2057.59,2108.6 2067.59,2118.6 2297.59,2118.6 2297.59,2168.6
GND on Top Layer "GND" (solid, remove dead copper, pour order 16): 300,1090 500,1090 500,1010 300,1010
VBAT_NEG on Top Layer "GND" (solid, remove dead copper, pour order 15): 505,1220 505,1060 600,1060 600,1220
VBAT_POS on Top Layer "GND" (solid, remove dead copper, pour order 14): 300,1200 300,1100 500,1100 500,1200
GND on Top Layer "GND" (solid, remove dead copper, pour order 13): 1953.25,1701.15 2366.25,1701.15 2366.25,1642.15 2017.25,1642.15 1953.25,1642.15
MCU_3.3V on Top Layer "GND" (solid, remove dead copper, pour order 12): 2105.25,1936.15 2332.25,1936.15 2332.25,1917.15 2332.25,1713.15 2105.25,1713.15
NetL101_1 on Top Layer "GND" (solid, remove dead copper, pour order 11): 2067.25,1703.15 2083.25,1703.15 2083.25,1933.15 2007.25,1933.15 2007.25,1783.15 2067.25,1783.15
VBAT_POS on Top Layer "GND" (solid, remove dead copper, pour order 10): 1835.25,1778.15 2042.25,1778.15 2063.25,1757.15 2063.25,1697.15 1835.25,1697.15
VOS_LORA on Top Layer "GND" (solid, remove dead copper, pour order 9): 2132.59,2218.6 2132.59,2178.6 2321.43,2178.6 2295.09,2473.6 2159.15,2473.6
NetL100_1 on Top Layer "GND" (solid, remove dead copper, pour order 8): 2107.87,2162.02 2107.87,2217.02 2112.87,2222.02 2112.87,2387.02 2042.87,2387.02 2042.87,2274.02 2092.87,2224.02 2092.87,2162.02
VBAT_POS on Top Layer "GND" (solid, remove dead copper, pour order 6): 1877.59,2185.6 1877.59,2268.6 2042.59,2268.6 2092.59,2218.6 2092.59,2178.6 2057.59,2178.6 2050.59,2185.6
VBAT_POS on Top Layer "VBAT_POS" (solid, remove dead copper, pour order 5): 300,1470 300,1195 405,1195 405,1470
VBAT_NEG on Top Layer "GND" (solid, remove dead copper, pour order 3): 760,1600 760,1510 640,1510 640,1600
VBAT_POS on Top Layer "GND" (solid, remove dead copper, pour order 2): 225,1514 340,1514 340,1470 225,1470
VSOLAR on Top Layer "GND" (solid, remove dead copper, pour order 1): 475,1580 475,1545 495,1545 495,1470 565,1470 565,1580
VBAT_POS on Top Layer "GND" (solid, remove dead copper, pour order 0): 425,1580 425,1545 405,1525 405,1470 340,1470 340,1580
VOS_LORA on 3.3V_PER "GND" (solid, remove dead copper, pour order 19): -5,2595 -5,-5 3295,-5 3295,2595
GND on Bottom Layer "GND" (solid, remove dead copper, pour order 17): 0,2600 0,0 3300,0 3300,2600
VBAT_POS on VBAT_POS "GND" (solid, remove dead copper, pour order 18): 0,2600 0,0 3300,0 3300,2600

## Text inside footprints (layer, text, board x,y; h text height)
E100: Top Overlay "A1" at 2910,2350 h59.06